# Altium PCB smart home3.PcbDoc
Units mm, origin at the board's own origin, x right, y up, seen from the top; angles counter-clockwise.
Board outline 151 x 86.38 mm, 2 copper layers (Top Layer, Bottom Layer); 27 components, 28 nets, 67 pads, 0 vias.
Unrouted connection lines stored in the file: 2.
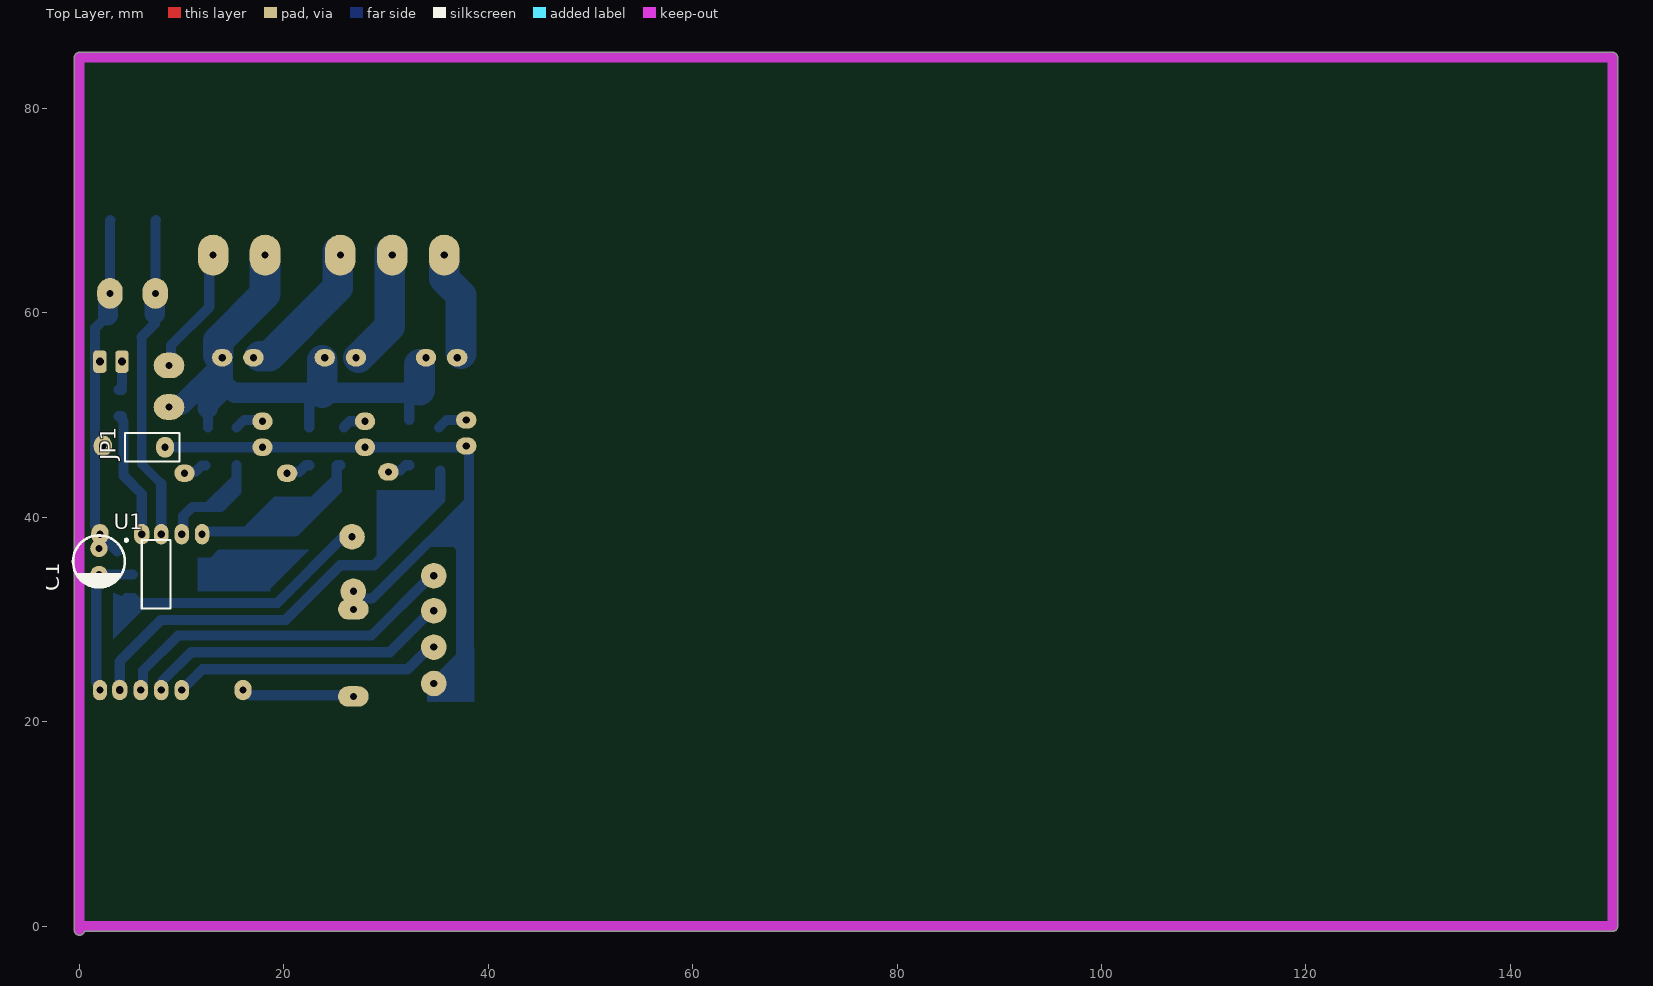
[diagram p0: Top Layer view]
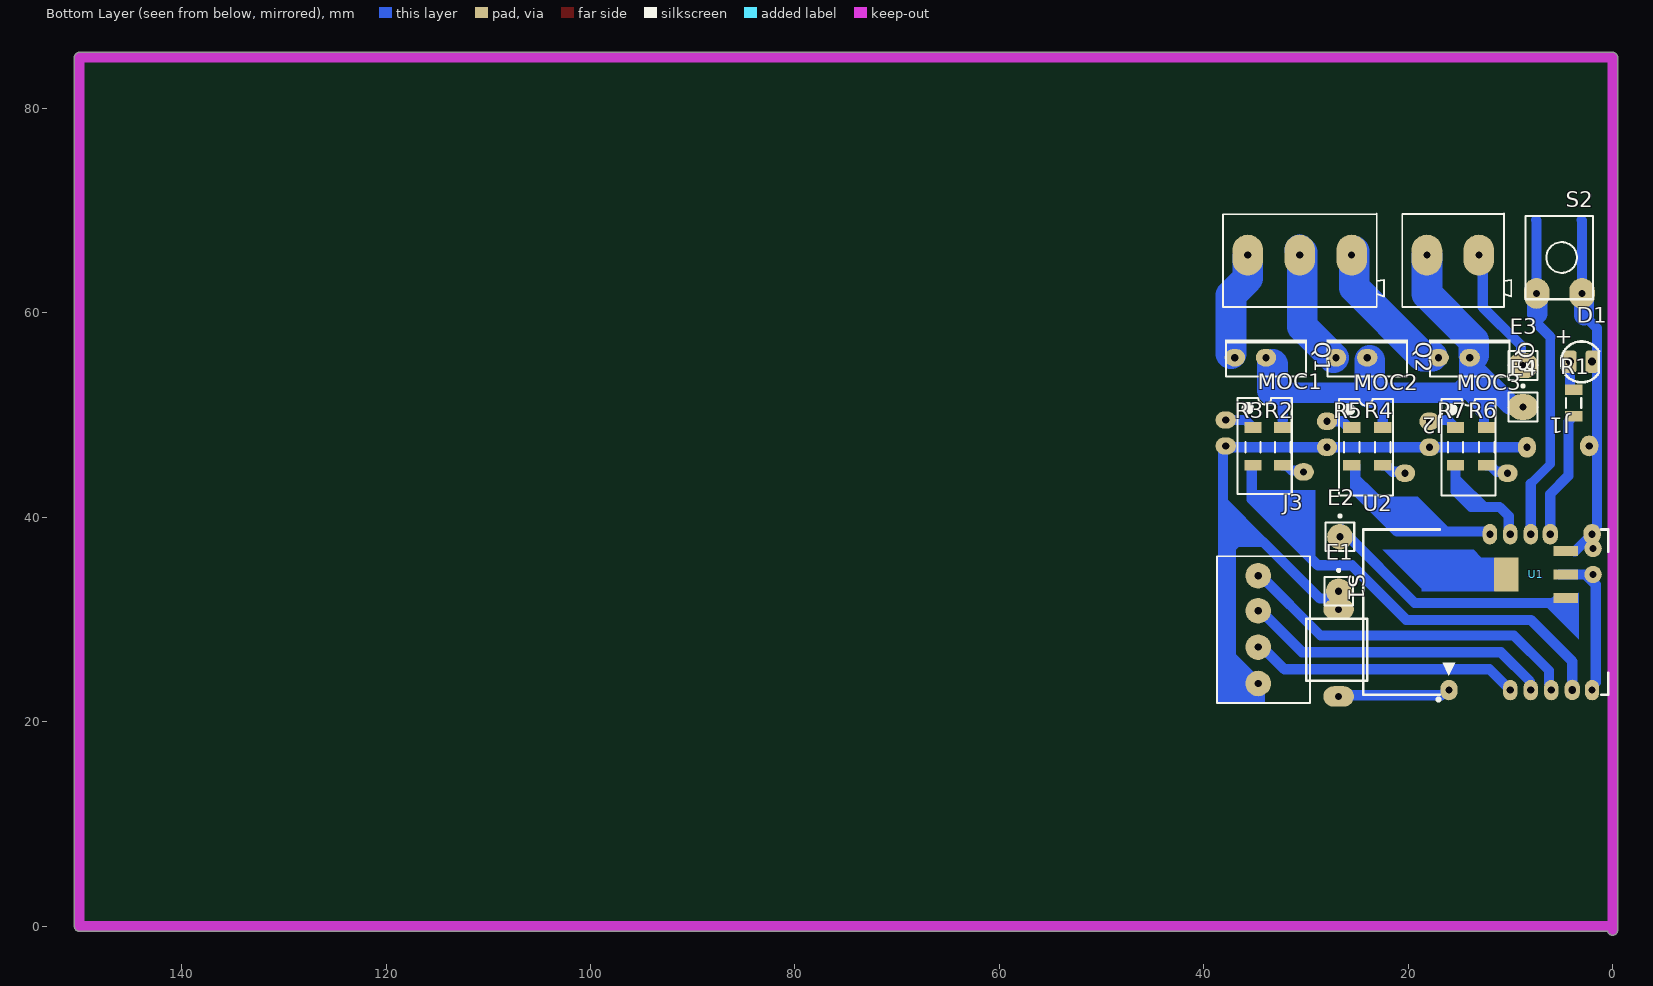
[diagram p1: Bottom Layer view, seen from below]
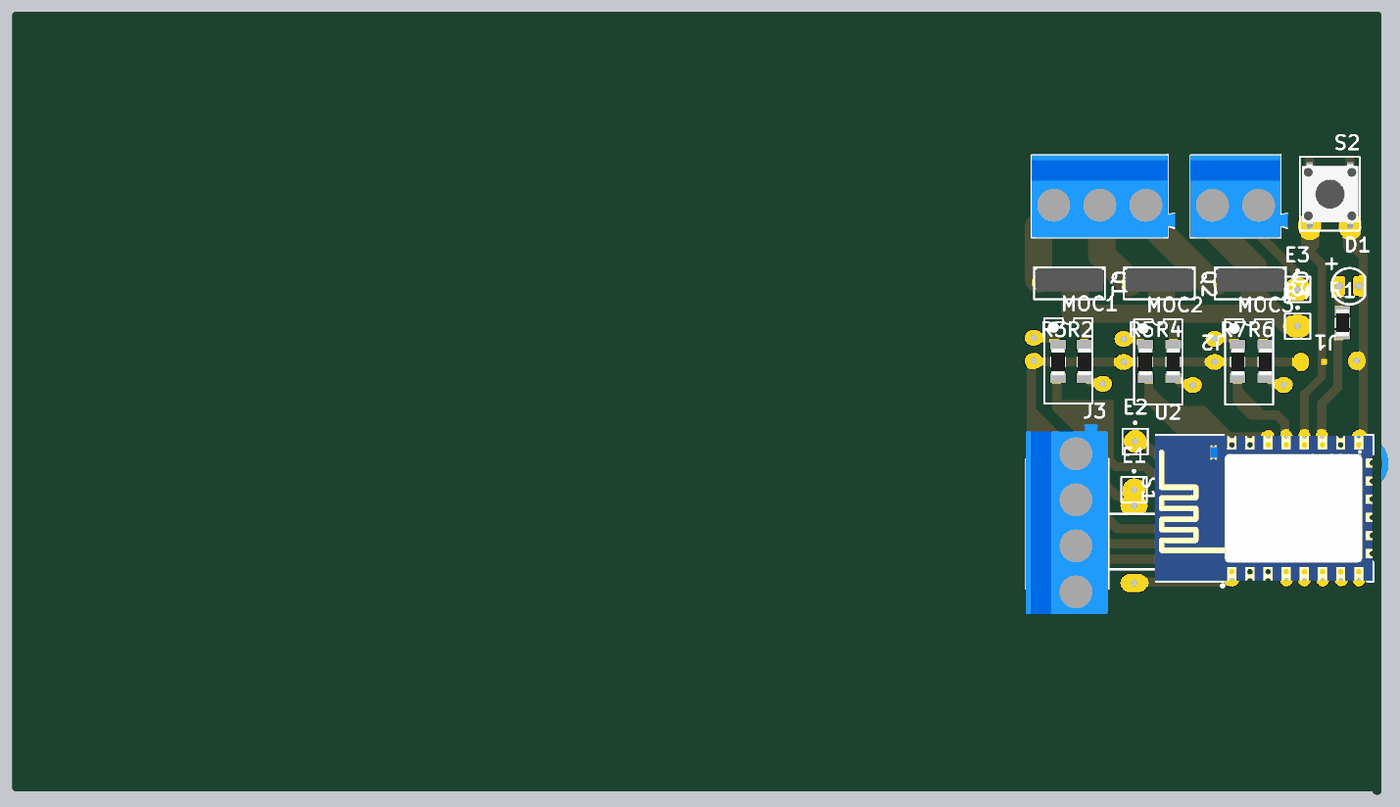
[diagram p2: 3D render of the assembled board from below, using the file's embedded part models]

## Layer stack, top to bottom
Top Solder: solder mask 0.0102, Solder Resist, Dk 3.5
Top Layer: signal copper 0.0356
Dielectric 1: dielectric 0.32, FR-4, Dk 4.8
Bottom Layer: signal copper 0.0356
Bottom Solder: solder mask 0.0102, Solder Resist, Dk 3.5

## Board outline
-0.5,-0.381 -0.5,85 cw(c0,85) 0,85.5 150,85.5 cw(c150,85) 150.5,85 150.5,0 cw(c150,0) 150,-0.5 0.486,-0.5 cw(c0,-0.381)

## Design rules (kind name [scope] priority, off if disabled: settings)
Clearance Clearance_1 [InPolygon] p1: gap=0.8 ignorepadtopadclearanceinfootprint=FALSE
Clearance [All] p2: gap=0.254 ignorepadtopadclearanceinfootprint=FALSE except(0: Arc-Hole Track-Hole SMDPad-Hole THPad-Hole Via-Hole Fill-Hole Poly-Hole Region-Hole Text-Hole)
PolygonConnect [All] p1: connectstyle=Relief reliefconductorwidth=0.254 reliefentries=4 polygonreliefangle="90 Angle" airgapwidth=0.254
RoomDefinition "smart home3" [InComponentClass('smart home3')] p1: confinementstyle=ConfineIn formatcopy=TRUE lockcomponents=FALSE outline 144.907,-4.953 247.904,-4.953 247.904,23.114 144.907,23.114
RoutingLayers [All] p1: top layer_v5=FALSE bottom layer_v5=TRUE
RoutingVias [All] p1: holewidth=0.711 width=2.5 viastyle="Through Hole" minholewidth=0.711 minwidth=1.27 maxholewidth=0.711 maxwidth=2
SolderMaskExpansion [All] p1: expansion=0.102 istentingtop=FALSE
Width [All] p1: maxlimit=3 minlimit=0.5 preferedwidth=1
29 further rules are at their usual default settings.

## Components (designator, comment, footprint, x,y, rotation, side; value= is the part's Value field where it differs from the comment)
C1 "=Value" ELEC-CAP-RAD10-20 1.905,35.687 r90 top
D1 "LED 3mm" LED-3mm 3.14,55.118 r90 bottom
E1 "Antenna" PIN1#1 26.797,32.766 r180 bottom
E2 "Antenna" PIN1#1 26.67,38.1 r180 bottom
E3 "Antenna" PIN1#2 8.763,54.864 r180 bottom
E4 "Antenna" PIN1#2 8.763,50.8 r180 bottom
J1 "TBlock-2" "KF300-2 PIN" 13.081,65.659 r270 bottom
J2 "TBlock-3" "KF300-3 PIN" 25.527,65.659 r270 bottom
J3 "TBlock-4" "KF300-4 PIN" 34.671,36.703 r180 bottom
JP1 "Jumper" "Header 2X1" 7.112,46.863 r180 top
MOC1 "MOC3021-3" DIP-6 34.036,46.99 r180 bottom
MOC2 "MOC3021-3" DIP-6 24.13,46.863 r180 bottom
MOC3 "MOC3021-3" DIP-6 14.097,46.863 r180 bottom
Q1 "MODEL" SOT32 33.909,55.626 r180 bottom
Q2 "MODEL" SOT32 24.003,55.626 r180 bottom
Q3 "MODEL" SOT32 13.97,55.626 r180 bottom
R1 "10K" "RES 1206 (3216X08L)"#1 3.81,51.181 r90 bottom
R2 "10K" "RES 1206 (3216X08L)"#2 32.258,46.863 r90 bottom
R3 "10K" "RES 1206 (3216X08L)"#2 35.179,46.863 r90 bottom
R4 "10K" "RES 1206 (3216X08L)"#2 22.479,46.863 r90 bottom
R5 "10K" "RES 1206 (3216X08L)"#2 25.527,46.863 r90 bottom
R6 "10K" "RES 1206 (3216X08L)"#2 12.319,46.863 r90 bottom
R7 "10K" "RES 1206 (3216X08L)"#2 15.367,46.863 r90 bottom
S1 "PB-2pin" PB-2pin 29.972,30.099 r270 bottom
S2 "PUSH BUTTON DOUBLE" "PUSH BUTTON" 5.207,65.405 r270 bottom
U1 "LM1117MP-3.3" MP04A_N 7.493,34.417 r0 top
U2 "ESP_12_E" ESP_12_E 16.002,22.729 r90 bottom

## Footprints (in the part's own frame and the unit in brackets; to place one, negate y for a bottom-side part, rotate by r counter-clockwise, add the part's x,y. Pads: shape width x height; smd on the part's side, far side on the other; paste and mask are expansions set on the pad)
DIP-6 [mm] "DIP; 6 Leads; Row Spacing 7.62 mm; Pitch 2.54 mm"
  oval 2x1.7 hole 0.7: 1(-3.81,2.54) 2(-3.81,0) 4(3.81,-2.54)
  silkscreen extent -2.65,-4.7 2.65,4.7
ELEC-CAP-RAD10-20 [mm]
  round 1.7 hole 0.7: 1(-1.27,0) 2(1.27,0)
  silkscreen extent -2.54,-2.54 2.54,2.54, body extent -3.15,-3.15 3.15,3.15, height 10.26
ESP_12_E [mm] "ESP-12 Wi-Fi Module by AI-Thinker"
  oval 2x1.7 hole 0.7: 1(0.375,0) 15(15.625,-14)
  oval 2x1.397 hole 0.7: 4(0.375,-6) 5(0.375,-8) 6(0.375,-10) 8(0.375,-14) 18(15.625,-8) 19(15.625,-6) 20(15.625,-4)
  silkscreen extent -0.7,-15.57 16.08,8.37, body extent 0,-15.49 16,8.51, height 2.75
"Header 2X1" [mil]
  oval 70x80 hole 27.56: 1(-50,0) 2(190,-5)
  silkscreen extent -105,-55 105,55, body extent -100,-50 100,50, height 374
"KF300-2 PIN" [mm]
  oval 4x3 hole 0.7: 1(0,0) 2(0,-5.08)
  silkscreen extent -4.06,-7.49 5.08,3.17, body extent -3.99,-7.5 5.08,3.24, height 12.52
"KF300-3 PIN" [mm]
  oval 4x3 hole 0.7: 1(0,0) 2(0,-5.08) 3(0,-10.16)
  silkscreen extent -4.06,-12.57 5.08,3.17, body extent -4,-12.57 5.07,3.25, height 12.78
"KF300-4 PIN" [mm]
  round 2.5 hole 0.7: 1(0,-2.413) 2(0,-5.842) 3(0,-9.398) 4(0,-12.954)
  silkscreen extent -4.04,-14.86 5.08,-0.51, body extent -4.04,-17.65 5.03,3.25, height 12.52
LED-3mm [mm] "LED; 2 Leads"
  rrect50% 2.2x1.3 hole 0.8: 1(0.127,1.016) 2(0.127,-1.143)
  silkscreen extent -1.9,-1.81 2.09,1.89
MP04A_N [mm] "SOT223, 4-Leads, Body 6.5x3.5mm, Pitch 2.3mm, Lead Span 7mm, IPC Medium Density"
  rect 2.4x1 smd far side: 1(-2.9,2.3) 2(-2.9,0) 3(-2.9,-2.3)
  rect 2.4x3.3 smd far side: 4(2.9,0)
  silkscreen extent -3.02,-3.35 1.4,3.47, body extent -1.85,-3.35 1.85,3.35, height 1.8
PB-2pin [mm] "Switch"
  oval 2x3 hole 0.7: 1(-0.901,3.175) 2(7.62,3.175)
  silkscreen extent 0,0 6.1,5.97
PIN1#1 [mm] "Generic Antenna; 1 Lead"
  round 2.5 hole 0.7: 1(0,0)
  silkscreen extent -1.4,-1.4 1.4,2.17
PIN1#2 [mm] "Generic Antenna; 1 Lead"
  oval 3x2.5 hole 0.7: 1(0,0)
  silkscreen extent -1.4,-1.4 1.4,2.17
"PUSH BUTTON" [mm]
  oval 3x2.5 hole 0.7: 2(3.493,2.222) 4(3.492,-2.223)
  silkscreen extent -4.06,-3.3 4.06,3.3, body extent -3.93,-3.08 3.99,3.12, height 5.21
"RES 1206 (3216X08L)"#1 [mm] "Chip Resistor, 2-Leads, Body 3.2x1.6mm, IPC High Density _ (0.125 W)"
  rect 1.05x1.7 smd: 1(-1.295,0) 2(1.301,0)
  silkscreen extent -0.5,-0.75 0.5,0.75, body extent -1.52,-0.76 1.53,0.76, height 0.6
"RES 1206 (3216X08L)"#2 [mm] "Chip Resistor, 2-Leads, Body 3.2x1.6mm, IPC High Density _ (0.125 W)"
  rect 1.05x1.7 smd: 1(-1.763,0) 2(1.937,0)
  silkscreen extent -0.5,-0.75 0.5,0.75, body extent -1.52,-0.76 1.53,0.76, height 0.6
SOT32 [mm] "SIP with Mounting Hole; 3 Leads; Body 10.7 x 7.6 x 2.6 mm (typ); Pitch 2.2 mm"
  oval 2x1.7 hole 0.7: 1(-3.048,0) 2(0,0)
  silkscreen extent -4,-1.85 4,1.8, body extent -3.8,-1 3.8,1.55, height 15.19

## Part data
C1: library part "Capacitor Electrolytic", "Electrolytic Capacitor"
D1: "Typical LED", Designer="Seyed Mohsen Ghasemian", PackageDescription="LED; 2 Leads", PackageReference=LED, Published=02/04/2012, Publisher=www.picpars.com
E1 E2 E3 E4: "Generic Antenna", LatestRevisionDate=17-Jul-2002, LatestRevisionNote="Re-released for DXP Platform.", PackageReference=PIN1, Published=24-Mar-1999, Publisher="Altium Limited"
MOC1 MOC2 MOC3: "Opto-Triac", Designer="Seyed Mohsen Ghasemian", E-mail=picpars@gmail.com, LatestRevisionDate=17-11-2011, Published=17-11-2011, Publisher=www.picpars.com, WEB=www.picpars.com
Q1 Q2 Q3: library part BD139, "NPN Bipolar Transistor"
R1 R2 R3 R4 R5 R6 R7: library part Resistor, "Resistor", Power="1/4 W", Tolerance=5%
S1 S2: "Switch"
  S1: Designer="Seyed Mohsen Ghasemian", E-mail=picpars@gmail.com, Publisher=www.picpars.com, WEB=www.picpars.com
U1: "800mA Low-Dropout Linear Regulator", DigiKeyPartNumber=LM1117MP-3.3CT-ND, Manufacturer="National Semiconductor", PackageTopMarking=XYTT*N05A, PowerWise=N, Code_IPC=SOT223-4, Code_JEDEC=TO-261-AA, ComponentLink1Description="LM1117 Datasheet", ComponentLink1URL=http://www.national.com/ds/LM/LM1117.pdf, ComponentLink2Description="LM1117 Web Page", ComponentLink2URL=http://www.national.com/pf/LM/LM1117.html, ComponentLink3Description="MP04A Package Page", ComponentLink3URL=http://www.national.com/packaging/folders/mp04a.html, CompType="LDO IC", DatasheetVersion=Apr-2006, PackageDescription="Molded SOT-223, 6.50 x 3.56 x 1.6mm Body, 4 Lead, 2.3mm Pitch", PackageReference=MP04A, PackageVersion="revB, Apr-2003", PartNumber=LM1117MP-3.3, PinCount=4, Published=4-Dec-2008, Publisher="Altium Limited", RoHS=O
U2: "ESP-12 Wi-Fi Module by AI-Thinker", IC=ESP8266-EX, Vendor=Ai-thinker

## Free pads (board coordinates)
  oval 1.5x2 hole 0.762: 2(6.096,38.354) 3(3.937,23.114)

## Nets (pads, with @x,y where several pads share a name; then routed paths per layer and width w, separated by ;. In a path a pad name is that pad's centre, name@x,y a point inside that pad or via, vN(x,y) a via of type N, cw(c..) or ccw(c..) an arc to the next point about the centre after c; other vN are vias at no path point)
btn: S2.4 U2.18 | length 32.1
  Bottom Layer w0.9: 6.096,57.658 6.096,45.212 8.002,43.306
  Bottom Layer w1: 6.096,57.658 7.366,58.928 7.366,59.944 ; S2.4 7.429,69.025 7.493,69.088 ; U2.18 8.002,43.306
  Bottom Layer w2: 7.366,59.944 7.366,61.849 S2.4
faz: E4.1 J1.2 Q1.2 Q2.2 Q3.2 R2.2 R4.2 R6.2 | length 58.9
  Bottom Layer w1: R6.2@12.573,48.825 12.573,50.673 ; 14.414,52.514 14.883,52.514 15.201,52.197 ; 14.707,52.807 14.898,52.998 ; R4.2 22.479,52.197 ; 32.258,49.53 32.258,52.197 ; 32.639,52.197 32.639,52.451
  Bottom Layer w2: E4.1@8.337,50.8 E4.1 ; E4.1@8.681,50.998 9.977,50.998 13.82,54.841 13.82,55.476 Q3.2 14.008,55.588 14.008,53.505 ; 12.573,50.673 12.573,51.054 13.716,52.197 13.716,52.807 13.716,53.213 14.008,53.505 ; 14.414,52.514 14.008,52.921 14.008,53.505 ; 15.201,52.197 22.479,52.197 23.749,52.197 32.258,52.197 32.639,52.197
  Bottom Layer w3: Q3.2@13.589,55.88 13.589,57.277 18.161,61.849 J1.2 ; 23.749,52.197 Q2.2@23.749,55.372 ; 33.274,52.451 Q1.2@33.274,54.991
GND: C1.2 D1.2 E1.1 J3.4 JP1.1 JP1.2 MOC1.2 MOC2.2 MOC3.2 S1.1 S2.2 U1.1 U2.15 | length 112.1
  Bottom Layer w1: 2.794,59.792 1.524,58.522 1.524,39.171 2.002,38.693 U2.15 U1.1@3.692,36.664 ; S2.2 2.984,69.025 3.048,69.088 ; JP1.1@8.382,46.99 8.509,46.863 MOC3.2 ; MOC3.2@18.161,46.863 MOC2.2 37.584,46.863 37.711,46.99 MOC1.2 38.1,46.736 38.1,27.178 37.338,26.416 ; S1.1 26.832,31 27.883,32.051 28.624,32.051 29.21,32.637 29.21,32.639 34.163,37.592 36.752,37.592 37.338,37.006 37.338,26.416 ; J3.4 37.338,26.416
  Bottom Layer w2: 2.794,59.792 2.794,61.118 2.889,61.213 2.889,61.817 S2.2
NetD1_1: D1.1 R1.2 | length 3.1
  Bottom Layer w1: R1.2 4.131,52.482 4.156,52.507 D1.1
NetE3_1: E3.1 J1.1 | length 13.1
  Bottom Layer w1: E3.1@7.991,54.727 8.114,54.727 8.944,55.557 8.944,56.823 12.698,60.577 12.698,65.276 J1.1
NetJ2_1: J2.1 Q3.1 | length 14
  Bottom Layer w3: Q3.1@17.653,55.753 18.542,55.753 25.273,62.484 J2.1@25.273,66.04
NetJ2_2: J2.2 Q2.1 | length 11.9
  Bottom Layer w3: Q2.1@27.305,55.626 30.353,58.674 30.353,65.913 J2.2@30.607,66.167
NetJ2_3: J2.3 Q1.1 | length 10.2
  Bottom Layer w3: J2.3@35.687,65.532 35.687,63.381 37.338,61.73 Q1.1@37.338,56.007
NetMOC1_1: MOC1.1 R3.2 | length 3
  Bottom Layer w1: R3.2 35.909,49.53 MOC1.1
NetMOC1_4: MOC1.4 R2.1 | length 2.3
  Bottom Layer w1: MOC1.4 30.36,44.584 31.417,44.584 31.933,45.1 R2.1
NetMOC1_6: 
NetMOC2_1: MOC2.1 R5.2 | length 2.3
  Bottom Layer w1: R5.2@25.877,48.825 26.455,49.403 MOC2.1
NetMOC2_4: MOC2.4 R4.1 | length 2.5
  Bottom Layer w1: MOC2.4 20.454,44.457 21.511,44.457 22.154,45.1 R4.1
NetMOC2_6: 
NetMOC3_1: MOC3.1 R7.2 | length 2.9
  Bottom Layer w1: R7.2 16.097,49.53 17.78,49.53 MOC3.1
NetMOC3_4: MOC3.4 R6.1 | length 2.3
  Bottom Layer w1: MOC3.4 10.626,44.323 10.76,44.457 11.351,44.457 11.969,45.075 R6.1@12.319,45.075
NetMOC3_6: 
NetR1_1: pad.2 R1.1 | length 12.7
  Bottom Layer w1: R1.1 4.135,49.886 4.16,49.861 4.16,49.536 4.318,49.378 4.318,44.069 6.096,42.291 pad.2
o1: R7.1 U2.19 | length 10.2
  Bottom Layer w1: U2.19@10.078,38.689 10.078,39.012 10.159,39.093 10.159,40.131 11.049,41.021 13.843,41.021 15.367,42.545 R7.1
o2: R5.1 U2.20 | length 17.4
  Bottom Layer w1: U2.20@12.159,38.608 21.082,38.608 25.177,42.703 25.177,45.075 25.202,45.1 R5.1
o3: pad.3 R3.1 | length 43.4
  Bottom Layer w1: pad.3@3.937,23.241 3.937,25.908 8.001,29.972 20.193,29.972 25.527,35.306 28.829,35.306 35.306,41.783 R3.1@35.306,44.577
o4: 
rst: S1.2 U2.1 | length 11.7
  Bottom Layer w1: U2.1@16.159,23.358 16.159,22.733 16.618,22.733 16.745,22.606 26.468,22.606 26.519,22.556 27.101,22.556 S1.2@27.178,22.479
s1: J3.3 U2.4 | length 26.5
  Bottom Layer w1: U2.4 10.002,23.298 10.185,23.481 10.379,23.481 12.044,25.146 32.106,25.146 34.265,27.305 J3.3
s2: J3.2 U2.5 | length 30.3
  Bottom Layer w1: U2.5 8.078,23.18 8.078,23.953 10.922,26.797 30.353,26.797 34.417,30.861 J3.2
s3: J3.1 U2.6 | length 33.9
  Bottom Layer w1: U2.6@6.078,23.439 6.078,23.589 6.223,23.734 6.223,25.019 9.652,28.448 28.575,28.448 34.417,34.29 J3.1
vDD: E2.1 U1.3 | length 25.2
  Bottom Layer w1: U1.3 5.293,32.117 5.787,31.623 19.356,31.623 26.17,38.437 26.17,38.512 26.52,38.862 E2.1@26.595,38.862
vesp: C1.1 U1.2 U1.4 U2.8 | length 14.4
  Bottom Layer w1: U2.8 2.002,23.513 1.651,23.864 1.651,33.401 2.667,34.417 U1.2 U1.2@5.207,34.417

## Keep-outs
Keep-Out Layer:
  lines w1: 0,-0.381 0,85 150,85 150,0 0,0

## Other copper
Bottom Layer:
  rectangle net vesp: 11.557,32.766 18.669,36.068
  region net GND: 34.036,23.241 34.036,21.971 38.608,21.971 38.608,27.305
  region net vDD: 6.604,31.369 3.302,28.067 3.302,32.639
  region: 16.256,42.926
  region net o1: 14.986,44.069 11.938,41.021 13.97,41.021 15.113,42.164
  region net o2: 24.765,44.069 22.352,41.656 22.352,40.767 23.368,40.767 25.019,42.418
  region net o2: 16.002,38.989 19.05,42.037 23.114,42.037 23.114,41.275 20.701,38.862
  region: 17.272,40.513
  region net o2: 24.765,44.069 22.987,42.291 24.892,42.291 21.463,38.862 19.431,38.862 22.606,42.037 22.86,41.783 24.384,41.783 24.003,41.402 21.971,41.402
  region: 27.178,40.894
  region net o3: 35.088,42.672 29.083,42.672 29.083,36.195 29.718,36.195 35.491,41.968
  region net GND: 33.909,37.973 37.846,41.91 37.846,36.957
  region net vesp: 18.542,32.893 18.288,32.893 18.288,35.687 19.431,36.83 13.589,36.83 12.827,36.068 12.827,35.56 18.161,35.56 19.431,36.83 22.479,36.83

## Text inside footprints (layer, text, board x,y; h text height)
D1: Bottom Overlay "+" at 3.902,58.293 h1.52 r180
U2: Mechanical 13 "CUTOUT POLYGON" at 23.368,22.856 h0.25 r270; Mechanical 13 "ANTENNA AREA" at 23.876,22.856 h0.25 r270